# Altium PCB Amber_Main_Board.PcbDoc (part 2 of 6)
Units mm, origin at the board's own origin, x right, y up, seen from the top; angles counter-clockwise.
Board outline 90 x 23 mm, 4 copper layers (Top Layer, Power, Ground, Bottom Layer), stack 1.142 mm thick; 237 components, 104 nets, 614 pads, 347 vias.
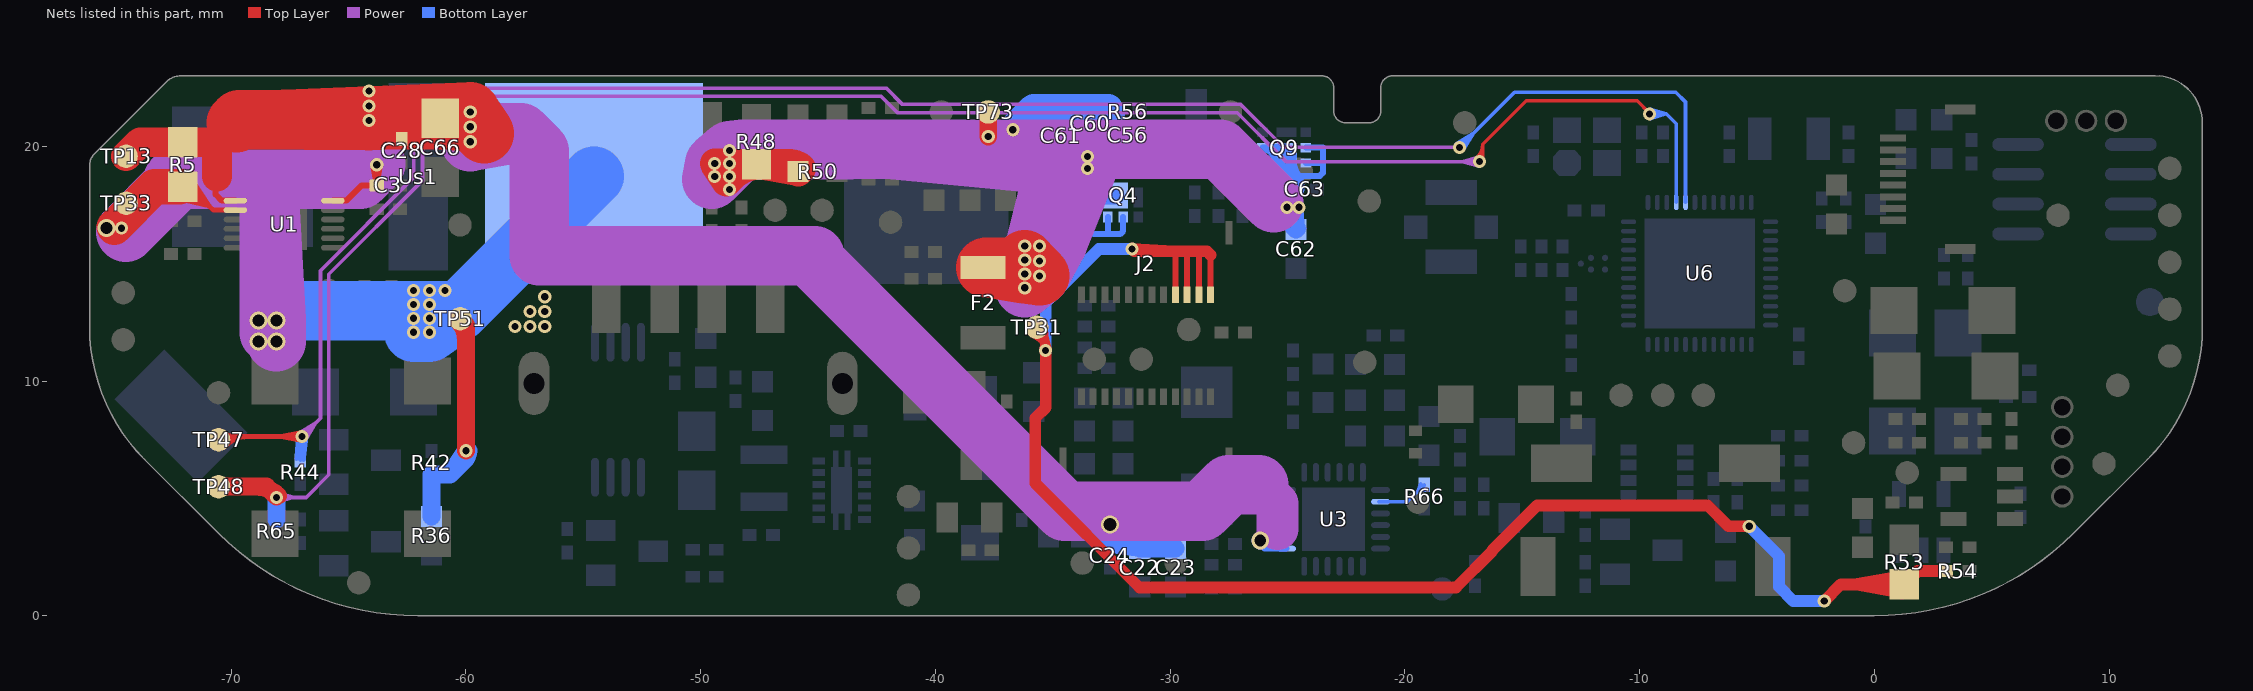
[diagram p4: the nets of this part, all layers, seen from the top]

## Via types
v1: diameter 0.559, hole 0.305, Top Layer to Bottom Layer, tented both sides, 306 vias
v2: diameter 0.66, hole 0.33, Top Layer to Bottom Layer, tented both sides, 16 vias
v3: diameter 0.762, hole 0.508, Top Layer to Bottom Layer, tented both sides, 12 vias
v4: diameter 0.6, hole 0.3, Top Layer to Bottom Layer, tented both sides, 9 vias
v5: diameter 0.5, hole 0.3, Top Layer to Bottom Layer, 3 vias
v6: diameter 0.762, hole 0.559, Top Layer to Bottom Layer, tented both sides, 1 vias

## Nets (pads, with @x,y where several pads share a name; then routed paths per layer and width w, separated by ;. In a path a pad name is that pad's centre, name@x,y a point inside that pad or via, vN(x,y) a via of type N, cw(c..) or ccw(c..) an arc to the next point about the centre after c; other vN are vias at no path point) (continued)
AW_VCC-: J2.1 J2.2 J2.3 J2.4 R53.2 R54.1 TP31.1 | length 99.8
  Top Layer w0.254: TP31.1@-35.984,12.061 -35.489,11.72 ; TP31.1@-35.808,11.934 cw(c-36.048,11.232) v1@-35.306,11.232 ; TP31.1@-35.726,12.174 cw(c-35.927,11.587) -35.306,11.587 ; TP31.1@-35.643,12.415 cw(c-35.805,11.943) -35.306,11.943 ; TP31.1@-35.533,11.947 cw(c-35.449,11.763) -35.306,11.906 ; v1@-35.458,11.291 -35.405,11.603 ; v1@-35.457,11.322 -35.306,11.906 ; v1@-35.438,11.379 ccw(c-35.702,11.532) -35.408,11.611 ; v1@-35.414,11.411 ccw(c-35.674,11.671) -35.306,11.671 ccw(c-34.938,11.671) v1@-35.198,11.411 ; -35.414,11.634 ccw(c-35.137,11.708) v1@-35.247,11.444 ; TP31.1@-35.347,12.133 ccw(c-35.163,12.049) -35.306,11.906 ; TP31.1@-35.314,12.295 -35.489,11.72 ; v1@-35.177,11.384 -35.405,11.603 ; v1@-35.155,11.322 -35.306,11.906 ; J2.4@-29.78,13.675 -29.78,15.523 ; J2.4@-29.78,13.875 -29.78,14.787 ; J2.3@-29.28,13.675 -29.28,15.523 ; J2.3@-29.28,13.875 -29.28,14.787 ; J2.2@-28.78,13.675 -28.78,15.486 ; J2.2@-28.78,13.875 -28.78,14.787 ; J2.1@-28.28,13.675 -28.28,15.367 ; J2.1@-28.28,13.875 -28.28,14.787 ; -35.489,11.72 TP31.1@-35.687,12.287 -35.306,11.906 ; -35.405,11.603 v1(-35.306,11.303) -35.306,11.906
  Top Layer w0.5: v1(-35.306,11.303) -35.306,8.869 -35.75,8.425 -35.75,5.647 -31.308,1.205 -17.825,1.205 -16.285,2.745 -16.285,2.782 -14.368,4.699 -7.112,4.699 -6.223,3.81 ; v1@-31.602,15.642 ccw(c-31.316,15.928) -31.316,15.523 ; -29.826,15.523 v1(-31.623,15.621) -31.525,15.523 -29.78,15.523 -29.28,15.523 -28.436,15.523 -28.28,15.367 ; v1(-2.14,0.625) -1.429,1.336 R53.2@1.27,1.336 ; R53.2@1.005,1.071 ccw(c0.365,0.431) 0.365,1.336 ccw(c0.365,2.241) R53.2@1.005,1.601 ; R53.2@1.16,1.226 R53.2@1.27,1.336 ; R53.2@1.162,1.002 0.599,1.367 ; R53.2@1.162,1.67 0.599,1.305 ; R53.2@1.168,0.95 0.599,1.305 ; R53.2@1.168,1.722 0.599,1.367 ; R53.2@1.237,0.962 -0.855,1.336 ; R53.2@1.237,1.71 -0.855,1.336 ; R53.2@1.27,1.311 0.599,1.305 ; R53.2@1.27,1.361 0.599,1.367 ; R54.1@3.006,1.905 R53.2@1.839,1.905 ; R54.1@3.056,1.905 R53.2@1.839,1.905 ; -6.223,3.81 v1(-5.334,3.81) -6.223,3.81 ; -0.855,1.336 R53.2@1.27,1.336 ; R53.2@1.27,1.336 R53.2@1.839,1.905
  Bottom Layer w0.5: v1(-35.306,11.303) -35.306,13.362 -33.047,15.621 ; v1(-5.334,3.81) -4.064,2.54 -4.064,1.233 -3.456,0.625 ; -33.047,15.621 v1(-31.623,15.621) -33.047,15.621 ; -3.456,0.625 v1(-2.14,0.625) -3.456,0.625
BAT: C22.1 C23.1 C24.1 C28.1 C66.1 R5.2 TP13.1 U1.7 U3.13 U3.14 | length 169
  Top Layer w0.254: -70.6,18.714 -70.666,18.648 -70.666,17.952 -70.396,17.682 U1.7@-69.82,17.682
  Top Layer w1.27: -70.6,18.714 -70.6,20.177 ; -69.777,21 -70.6,20.177 ; TP13.1@-74.476,19.571 -73.875,20.172 ; TP13.1@-74.476,19.571 -73.875,20.172 ; TP13.1@-74.476,19.571 -73.875,20.172 ; -73.875,20.172 R5.2@-72.063,20.172 ; -73.875,20.172 R5.2@-72.063,20.172 ; R5.2@-72.063,20.172 -70.605,20.172 -70.6,20.177
  Top Layer w2.54: -69.777,21 -69.65,21.127 ; -69.65,21.127 v1(-64.135,21.095) ; -69.65,21.127 C66.1@-61.087,21.127 ; v1(-64.135,21.095) -67.716,21.141 v1(-59.817,21.463) ; v1(-64.135,21.095) v1(-59.817,21.463) ; v1(-64.135,21.095) -67.867,21.127 v1(-59.817,21.463) ; v1(-64.135,21.095) v1(-59.817,21.463) ; v1(-64.135,21.095) -69.509,21.127 C66.1@-61.087,21.195 ; v1(-64.135,21.095) C66.1@-61.087,21.195 ; C66.1@-61.087,21.127 v1(-59.817,21.463) ; C66.1@-61.087,21.127 v1(-59.817,21.463) ; C66.1@-61.087,21.127 -59.797,21.127 ; C66.1@-61.087,21.145 v1(-59.817,21.463) ; C66.1@-61.087,21.145 v1(-59.817,21.463) ; C66.1@-61.087,21.145 v1(-59.817,21.463) ; C66.1@-61.087,21.145 v1(-59.817,21.463) ; C66.1@-61.087,21.145 -59.797,21.127 ; C66.1@-61.087,21.145 -59.797,21.127 ; C66.1@-61.087,21.145 v1@-59.658,20.987 ; C66.1@-61.087,21.145 v1@-59.658,20.987 ; C66.1@-61.087,21.195 v1(-59.817,21.463) ; v1(-59.817,21.463) -59.797,21.127 ; v1(-59.817,21.463) -59.797,21.127 ; v1(-59.817,21.463) v1@-59.658,20.987 ; v1(-59.817,21.463) v1@-59.658,20.987 ; v1(-59.817,21.463) -59.797,21.127 ; v1(-59.817,21.463) -59.797,21.127 ; v1(-59.817,21.463) v1@-59.658,20.987 ; v1(-59.817,21.463) v1@-59.658,20.987 ; v1(-59.817,21.463) -59.213,20.543 v1@-59.658,20.987 ; -59.797,21.127 v1@-59.658,20.987
  Power w0.762: v3(-26.162,3.204) -25.425,3.94
  Power w1.778: -26.22,5.575 -25.425,4.78 -25.425,3.94 -25.425,3.697
  Power w2.54: -26.22,5.575 -27.51,5.575 -28.632,4.453 -34.491,4.453 -45.141,15.103 -45.141,15.342 -56.874,15.342 -56.874,19.79 -57.658,20.574 ; -57.658,20.574 v1(-59.817,20.193) -59.817,20.574 -57.658,20.574
  Bottom Layer w0.254: v3@-26.224,2.957 U3.13@-25.316,2.859 ; v3@-26.21,2.954 U3.13@-25.041,2.859 ; v3@-26.062,3.437 U3.13@-25.041,2.859 ; v3@-26.034,3.423 U3.13@-25.316,2.859 ; U3.14@-25.316,3.359 v3@-26.162,3.359 ; U3.14@-25.041,3.359 v3@-26.162,3.359 ; v3(-26.162,3.204) U3.13@-25.316,2.859 ; v3(-26.162,3.204) U3.13@-25.041,2.859 ; v3(-26.162,3.204) v3@-26.162,3.359 ; v3(-26.162,3.204) -26.162,3.048 -25.973,2.859 ; -25.973,2.859 U3.13@-25.316,2.859 ; -25.973,2.859 U3.13@-25.041,2.859
  Bottom Layer w0.762: C24.1@-32.549,3.053 C23.1@-29.772,2.87 ; C24.1@-32.566,3.053 v6(-32.566,3.883) ; C24.1@-32.566,3.053 C22.1@-31.296,2.87 ; C24.1@-32.566,3.053 C23.1@-29.955,3.053 ; C24.1@-32.566,3.053 v6(-32.566,3.883) ; v6(-32.566,3.883) -32.566,3.103 v6(-32.566,3.883) ; C22.1@-31.296,2.87 C23.1@-29.772,2.87 ; C22.1@-31.296,2.87 C23.1@-29.955,3.053 ; C23.1@-29.955,3.053 C23.1@-29.772,2.87
  other v1: -57.912,12.319 -57.277,12.319 -56.642,12.319 -57.277,12.954 -56.642,12.954 -56.642,13.589 -59.817,20.828 -64.135,21.717 -64.135,22.352
BATTERY: C3.1 R5.1 TP33.1 U1.6 U1.8 Us1.1 | length 151.8
  Top Layer w0.203: R5.1@-72.279,17.77 -70.916,17.44 ; R5.1@-72.27,17.766 -71.22,17.6 ; R5.1@-72.217,17.966 -71.22,17.6 ; R5.1@-72.216,17.966 -70.916,17.44 ; R5.1@-72.18,17.737 -71.418,17.83 ; R5.1@-72.177,17.947 -71.418,17.83 ; R5.1@-72.129,18.15 -71.22,17.6 ; R5.1@-72.126,18.148 -70.916,17.44 ; R5.1@-72.119,18.144 -71.418,17.83 ; R5.1@-72.063,18.272 -71.748,18.272 -70.758,17.282 ; R5.1@-72.051,18.13 cw(c-71.964,17.284) -71.362,17.886 ; R5.1@-72.03,17.928 cw(c-71.907,16.737) -71.06,17.584 ; R5.1@-72.009,17.726 cw(c-71.851,16.189) -70.758,17.282 ; R5.1@-71.987,18.335 -71.22,17.6 ; R5.1@-71.85,18.486 -70.916,17.44 ; R5.1@-71.837,18.474 -71.418,17.83 ; R5.1@-71.832,18.469 -71.22,17.6 ; R5.1@-71.687,18.611 -70.916,17.44 ; R5.1@-71.652,18.571 -71.22,17.6 ; R5.1@-71.646,18.563 -71.418,17.83 ; R5.1@-71.54,18.247 ccw(c-71.097,18.247) -71.41,17.934 ; U1.8@-69.82,17.282 -70.758,17.282 ; R5.1@-72.063,18.247 -71.418,17.83 ; R5.1@-72.063,18.247 -71.22,17.6 ; R5.1@-72.063,18.247 -70.916,17.44 ; -71.418,17.83 -71.992,18.34 -70.916,17.44
  Top Layer w0.254: U1.6@-65.67,17.682 -65.094,17.682 -64.443,18.333 ; v1@-63.952,19.201 C3.1@-63.8,18.333 ; C3.1@-63.937,18.246 ccw(c-64.147,18.036) -64.147,18.333 ccw(c-64.147,18.63) C3.1@-63.937,18.42 ; v1@-63.908,19.106 cw(c-64.168,18.846) -63.8,18.846 cw(c-63.432,18.846) v1@-63.692,19.106 ; C3.1@-63.887,18.42 ccw(c-64.097,18.63) -63.8,18.63 ccw(c-63.503,18.63) C3.1@-63.713,18.42 ; C3.1@-63.85,18.333 -64.443,18.333 ; v1(-63.8,19.214) C3.1@-63.8,18.333 ; v1@-63.648,19.201 C3.1@-63.8,18.333 ; -64.443,18.333 C3.1@-63.8,18.333
  Top Layer w1.524: v3@-74.984,16.555 -73.267,18.272 R5.1@-72.2,18.272
  Power w2.54: v1@-74.493,16.35 -72.461,18.382 -72.461,18.587 -68.961,18.587 ; v1@-63.834,19.257 -64.503,18.587 -65.828,18.587 -68.961,18.587 ; -68.961,18.587 -68.371,17.996 ; -68.371,17.996 v3(-68.072,11.684) v3(-68.072,12.573) ; -68.371,17.996 v3(-68.072,12.573) ; -68.371,17.996 v3(-68.072,12.573) ; -68.371,17.996 -68.371,12.065 v3(-68.072,12.573)
  Bottom Layer w2.54: -68.219,12.205 -67.425,12.999 ; Us1.1@-54.545,18.726 -60.272,12.999 ; -67.425,12.999 v3(-68.072,12.573) -67.425,12.999 ; -67.425,12.999 -60.272,12.999 ; v1(-62.23,12.078) -60.272,12.999 ; v1(-62.23,12.078) v1(-61.559,12.67) ; v1(-62.23,12.078) -60.272,12.999 ; v1(-62.23,12.078) v1(-61.559,12.67) ; v1(-62.23,12.078) -60.272,12.999 ; v1(-62.23,12.078) v1(-61.559,12.67) ; v1(-62.23,12.078) -60.272,12.999 ; v1(-62.23,12.078) v1(-61.559,12.078) ; v1(-62.23,12.078) v1(-61.559,12.67) ; v1(-62.23,12.078) v1(-61.559,12.078) ; v1(-62.23,12.078) -60.272,12.999 ; v1(-62.23,12.078) v1(-61.559,12.078) ; v1(-62.23,12.078) v1(-61.559,12.67) ; v1(-62.23,12.078) v1(-61.559,12.078) ; v1(-62.23,12.078) -60.272,12.999 ; v1(-62.23,12.078) v1(-61.559,12.078) ; v1(-62.23,12.078) v1(-61.559,12.67) ; v1(-62.23,12.078) v1(-61.559,12.078) ; v1(-62.23,12.078) -60.272,12.999 ; v1(-62.23,12.078) v1(-61.559,12.078) ; v1(-62.23,12.078) -60.272,12.999 ; v1(-62.23,12.078) v1(-61.559,12.078) ; v1(-62.23,12.078) v1(-61.559,12.67) ; v1(-62.23,12.078) v1(-61.559,12.078) ; v1(-62.23,12.078) -60.272,12.999 ; v1(-62.23,12.078) -60.272,12.999 ; v1(-62.23,12.078) v1(-62.23,12.67) ; v1(-62.23,12.078) v1(-61.559,12.67) ; v1(-62.23,12.078) v1(-62.23,12.67) ; v1(-62.23,12.078) v1(-61.559,12.078) ; v1(-62.23,12.078) v1(-62.23,12.67) ; v1(-62.23,12.078) v1(-61.559,12.078) ; v1(-62.23,12.078) v1(-62.23,12.67) ; v1(-62.23,12.67) -60.272,12.999 ; v1(-62.23,12.67) v1(-61.559,12.67) ; v1(-62.23,12.67) v1(-61.559,12.078) ; v1(-62.23,12.67) v1(-61.559,12.078) ; v1(-61.559,12.078) -60.272,12.999 ; v1(-61.559,12.078) v1(-61.559,12.67) ; v1(-61.559,12.078) -60.272,12.999 ; v1(-61.559,12.078) v1(-61.559,12.67) ; v1(-61.559,12.078) -60.272,12.999 ; v1(-61.559,12.078) v1(-61.559,12.67) ; v1(-61.559,12.078) -60.272,12.999 ; v1(-61.559,12.078) -60.272,12.999 ; v1(-61.559,12.078) v1(-61.559,12.67) ; v1(-61.559,12.67) -60.272,12.999 ; v1(-61.559,12.67) -60.272,12.999 ; v1(-61.559,12.67) -60.272,12.999
  other v1: -62.23,13.263 -61.559,13.263 -62.23,13.856 -61.559,13.856 -60.887,13.856 -74.676,16.51
  other v3: -68.834,11.684 -68.834,12.573 -75.311,16.51
BUZZER_IO: R44.2 TP47.1 U6.41 | length 115.5
  Top Layer w0.203: TP47.1@-70.559,7.694 -70.03,7.65 ; TP47.1@-70.54,7.695 -69.986,7.601 ; TP47.1@-70.5,7.896 -70.03,7.65 ; TP47.1@-70.471,7.317 -69.986,7.601 ; TP47.1@-70.467,7.892 -69.986,7.601 ; TP47.1@-70.45,7.326 -70.03,7.65 ; TP47.1@-70.406,7.633 v1(-66.983,7.633) ; TP47.1@-70.401,7.362 cw(c-69.747,6.707) -69.747,7.633 ; TP47.1@-70.333,7.159 -69.986,7.601 ; TP47.1@-70.291,7.188 -70.03,7.65 ; TP47.1@-70.257,7.218 cw(c-69.256,6.217) -69.256,7.633 ; TP47.1@-70.257,7.781 ccw(c-69.898,8.14) -69.898,7.633 ; v1@-67.109,7.507 ccw(c-67.412,7.203) -67.412,7.633 ccw(c-67.412,8.062) v1@-67.109,7.758 ; v1@-67.04,7.464 -67.301,7.647 ; v1@-67.04,7.801 -67.301,7.618 ; v1@-67.025,7.46 -67.301,7.618 ; v1@-67.025,7.806 -67.301,7.647 ; v1@-67.001,7.456 -67.872,7.633 v1@-67.001,7.81 ; -70.03,7.65 TP47.1@-70.539,7.5 -69.986,7.601 ; -67.301,7.618 v1(-66.983,7.633) ; -67.301,7.647 v1(-66.983,7.633)
  Power w0.152: v1@-67.109,7.793 -66.38,8.235 v1@-66.823,7.507 ; v1(-66.983,7.633) -66.196,8.42 -66.196,14.703 -62.23,18.669 -62.23,21.59 -61.341,22.479 -42.1,22.479 -41.402,21.781 -26.988,21.781 -25.159,19.952 v1(-17.679,19.952) ; v1@-66.983,7.836 ccw(c-66.983,8.326) -66.636,7.98 ccw(c-66.289,7.633) v1@-66.78,7.633
  Bottom Layer w0.152: v1@-17.804,20.112 -17.076,20.554 v1@-17.519,19.826 ; v1(-17.679,19.952) -15.329,22.301 -8.462,22.301 -8.047,21.886 U6.41@-8.047,17.608 ; v1@-17.679,20.155 ccw(c-17.679,20.645) -17.332,20.299 ccw(c-16.985,19.952) v1@-17.476,19.952 ; U6.41@-8.047,17.833 -8.047,18.39
  Bottom Layer w0.203: R44.2@-67.202,6.684 v1@-66.983,7.524 ; R44.2@-67.196,6.707 -67.004,7.036 ; R44.2@-67.161,6.764 ccw(c-67.59,7.193) -66.983,7.193 ; v1@-67.161,7.628 R44.2@-67.049,6.745 ; v1@-67.16,7.615 -66.983,6.744 v1@-66.806,7.615 ; v1@-67.159,7.655 R44.2@-67.183,6.758 ; v1@-67.158,7.601 R44.2@-66.915,6.745 ; v1@-67.156,7.591 -66.998,7.315 ; v1@-67.151,7.575 -66.968,7.315 ; v1@-67.109,7.507 cw(c-67.412,7.203) -66.983,7.203 cw(c-66.554,7.203) v1@-66.857,7.507 ; R44.2@-66.983,6.682 v1(-66.983,7.633) ; R44.2@-66.907,6.659 v1@-66.983,7.524 ; R44.2@-66.908,6.667 -67.004,7.036 ; v1@-66.815,7.575 -66.998,7.315 ; v1@-66.814,7.576 R44.2@-67.183,6.758 ; v1@-66.81,7.591 -66.968,7.315 ; v1@-66.808,7.602 R44.2@-67.049,6.745 ; v1@-66.805,7.629 R44.2@-66.915,6.745 ; R44.2@-67.183,6.758 v1(-66.983,7.633) ; R44.2@-67.049,6.745 v1(-66.983,7.633) ; -67.004,7.036 -67.056,6.659 v1@-66.983,7.524 ; -66.998,7.315 v1(-66.983,7.633) ; v1(-66.983,7.633) R44.2@-66.915,6.745 ; v1(-66.983,7.633) -66.968,7.315
BUZZER_POWER: R65.2 TP48.1 U6.40 | length 101.8
  Top Layer w0.152: v1@-16.952,19.501 ccw(c-17.46,20.079) -16.691,20.079 ; v1@-16.852,19.387 ccw(c-17.164,19.742) -16.691,19.742 ; v1@-16.691,19.349 -16.691,20.079 ; v1(-9.579,21.381) -9.579,21.409 -10.11,21.94 -14.83,21.94 -16.691,20.079
  Top Layer w0.762: TP48.1@-70.539,5.5 -68.494,5.5 v1@-68.072,5.078 ; -68.94,5.5 cw(c-68.94,4.171) v1@-68,5.111
  Power w0.152: v1@-68.044,4.837 -67.335,5.039 v1@-68.044,5.24 ; v1@-68.024,4.841 -67.708,5.022 ; v1@-68.024,5.236 -67.708,5.055 ; v1@-68.006,4.846 -67.708,5.055 ; v1@-68.006,5.231 -67.708,5.022 ; v1@-67.928,4.895 cw(c-67.581,4.548) -67.581,5.039 cw(c-67.581,5.529) v1@-67.928,5.182 ; v1@-16.962,19.205 ccw(c-17.309,18.858) -17.309,19.349 ccw(c-17.309,19.839) v1@-16.962,19.492 ; v1@-16.884,19.156 -17.182,19.365 ; v1@-16.884,19.541 -17.182,19.332 ; v1@-16.866,19.151 -17.182,19.332 ; v1@-16.866,19.546 -17.182,19.365 ; v1@-16.846,19.147 -17.555,19.349 v1@-16.846,19.55 ; v1(-68.072,5.039) -67.708,5.022 ; v1(-68.072,5.039) -67.708,5.055 ; v1(-68.072,5.039) -66.802,5.039 -65.84,6.001 -65.84,14.551 -61.849,18.542 -61.849,21.336 -61.062,22.123 -42.316,22.123 -41.618,21.425 -27.14,21.425 -25.064,19.349 v1(-16.818,19.349) ; -17.182,19.332 v1(-16.818,19.349) ; -17.182,19.365 v1(-16.818,19.349)
  Bottom Layer w0.152: v1@-9.55,21.18 -8.863,21.381 ; v1@-9.55,21.582 -8.863,21.381 ; v1@-9.531,21.183 -9.215,21.364 ; v1@-9.531,21.578 -9.215,21.397 ; v1@-9.513,21.188 -9.215,21.397 ; v1@-9.513,21.573 -9.215,21.364 ; v1@-9.435,21.237 cw(c-9.088,20.89) -9.088,21.381 cw(c-9.088,21.871) v1@-9.435,21.524 ; U6.40@-8.447,17.608 -8.447,20.965 -8.863,21.381 ; U6.40@-8.447,17.833 -8.447,18.39 ; v1(-9.579,21.381) -9.215,21.364 ; v1(-9.579,21.381) -9.215,21.397 ; v1(-9.579,21.381) -8.863,21.381
  Bottom Layer w0.762: v1(-68.072,5.039) -68.072,4.151 v1(-68.072,5.039) ; v1(-68.072,5.039) R65.2@-68.072,4.101 v1(-68.072,5.039)
BUZZER_VCC: R36.1 R42.1 TP51.1 | length 15.6
  Top Layer w0.762: TP51.1@-60.336,12.566 cw(c-61.153,11.749) -59.998,11.749 ; TP51.1@-60.052,12.45 TP51.1@-60.252,12.65 -60.037,12.048 ; v1(-59.998,7.03) TP51.1@-59.998,12.396
  Bottom Layer w0.762: R42.1@-61.468,5.972 R36.1@-61.468,4.236 R42.1@-61.468,6.022 ; -60.056,6.645 ccw(c-60.441,7.03) v1@-59.896,7.03 ; R42.1@-61.468,6.022 -60.679,6.022 ; R42.1@-61.468,6.022 -60.679,6.022 ; -60.679,6.022 v1(-59.998,7.03) ; -60.679,6.022 -59.998,6.703 ; -59.998,6.703 v1(-59.998,7.03) ; -59.998,6.703 v1(-59.998,7.03)
CHARGE_O: C56.2 C60.1 C61.1 C62.1 C63.1 F2.2 Q4.1 Q4.2 Q4.5 Q4.6 Q4.7 Q9.1 Q9.2 Q9.5 Q9.6 Q9.7 R48.1 R50.1 R56.2 TP73.1 | length 1016.8
  Top Layer w0.762: v1(-37.751,20.415) TP73.1@-37.751,21.463 v1(-37.751,20.415)
  Top Layer w1.27: v1@-48.536,18.851 cw(c-47.625,17.94) R48.1@-47.625,19.228 ; R48.1@-47.958,19.184 v1(-48.768,18.711) ; R50.1@-46.173,19.243 cw(c-46.173,18.597) R50.1@-45.716,19.054 ; v1(-49.403,19.262) v1(-48.768,19.262) ; v1(-49.403,19.262) R48.1@-47.625,19.243 ; v1(-49.403,19.262) v1(-48.768,19.262) ; v1(-49.403,19.262) R48.1@-48.143,19.243 ; v1(-49.403,19.262) v1(-48.768,19.262) ; v1(-49.403,19.262) R48.1@-47.625,19.218 ; v1(-49.403,19.262) v1(-48.768,19.262) ; v1(-49.403,19.262) -48.269,19.055 ; v1(-49.403,19.262) v1(-48.768,19.262) ; v1(-49.403,19.262) R48.1@-48.143,19.243 ; v1(-49.403,19.262) v1(-48.768,19.262) ; v1(-49.403,19.262) R48.1@-48.143,19.243 ; v1(-49.403,19.262) v1(-48.768,18.711) ; v1(-49.403,19.262) v1(-48.768,18.711) ; v1(-49.403,19.262) v1(-48.768,18.711) ; v1(-49.403,19.262) v1(-48.768,18.711) ; v1(-49.403,19.262) v1(-48.768,18.711) ; v1(-49.403,19.262) v1(-48.768,18.711) ; v1(-49.403,19.262) v1(-48.768,18.711) ; v1(-49.403,19.262) v1(-48.768,18.711) ; v1(-49.403,19.262) v1(-48.768,18.711) ; v1(-49.403,19.262) v1(-48.768,18.711) ; v1(-49.403,19.262) v1(-48.768,18.711) ; v1(-49.403,19.262) v1(-48.768,18.711) ; v1(-49.403,19.262) v1(-48.768,18.711) ; v1(-49.403,19.262) v1(-48.768,18.711) ; v1(-49.403,19.262) v1@-48.895,18.491 ; v1(-49.403,19.262) v1@-48.895,18.491 ; v1@-48.895,18.491 v1(-48.768,19.262) ; v1@-48.895,18.491 R48.1@-48.143,19.243 ; v1(-48.768,18.711) v1(-48.768,19.262) ; v1(-48.768,18.711) v1(-48.768,19.262) ; v1(-48.768,18.711) v1(-48.768,19.262) ; v1(-48.768,18.711) v1(-48.768,19.262) ; v1(-48.768,18.711) v1(-48.768,19.262) ; v1(-48.768,18.711) v1(-48.768,19.262) ; v1(-48.768,18.711) v1(-48.768,19.262) ; v1(-48.768,18.711) v1(-48.768,19.262) ; v1(-48.768,18.711) v1(-48.768,19.262) ; v1(-48.768,18.711) v1(-48.768,19.262) ; v1(-48.768,18.711) v1(-48.768,19.262) ; v1(-48.768,18.711) v1(-48.768,19.262) ; v1(-48.768,18.711) R48.1@-48.143,19.243 ; v1(-48.768,18.711) -48.269,19.055 ; v1(-48.768,18.711) R48.1@-48.143,19.243 ; v1(-48.768,18.711) -48.269,19.055 ; v1(-48.768,18.711) R48.1@-48.143,19.243 ; v1(-48.768,18.711) R48.1@-48.143,19.243 ; v1(-48.768,18.711) -48.269,19.055 ; v1(-48.768,18.711) R48.1@-48.143,19.243 ; v1(-48.768,18.711) R48.1@-48.143,19.243 ; v1(-48.768,18.711) R48.1@-48.143,19.243 ; v1(-48.768,19.262) R48.1@-47.625,19.243 ; v1(-48.768,19.262) R48.1@-48.143,19.243 ; v1(-48.768,19.262) R48.1@-47.625,19.218 ; v1(-48.768,19.262) -48.269,19.055 ; v1(-48.768,19.262) R48.1@-48.143,19.243 ; -48.269,19.055 R48.1@-47.625,19.218 ; R48.1@-48.143,19.243 R48.1@-47.625,19.243 ; R48.1@-47.625,19.243 R50.1@-45.847,18.923 -46.167,19.243 R48.1@-47.625,19.243
  Top Layer w2.54: F2.2@-37.846,14.835 v1(-36.195,14.563) ; F2.2@-37.846,14.835 v1(-35.56,14.478) ; F2.2@-37.846,14.835 v1(-35.56,14.478) ; F2.2@-37.846,14.835 -35.965,14.835 ; F2.2@-37.523,14.835 -35.941,14.859 ; F2.2@-37.523,14.835 -35.965,14.835 ; F2.2@-37.523,14.835 -35.965,14.835 ; F2.2@-37.523,14.835 v1(-36.195,14.563) ; F2.2@-37.523,14.835 v1(-36.195,14.563) ; F2.2@-37.523,14.835 v1(-36.195,14.563) ; F2.2@-37.523,14.835 v1(-35.56,14.478) ; F2.2@-37.523,14.835 v1(-35.56,14.478) ; F2.2@-37.523,14.835 v1(-35.56,14.478) ; F2.2@-37.523,14.835 v1(-35.56,14.478) ; F2.2@-37.523,14.835 v1(-35.56,14.478) ; F2.2@-37.523,14.835 v1(-35.56,14.478) ; v1(-36.195,14.563) -35.941,14.859 ; v1(-36.195,14.563) -35.941,14.859 ; v1(-36.195,14.563) v1(-35.56,14.478) ; v1(-36.195,14.563) v1(-35.56,14.478) ; v1(-36.195,14.563) v1(-35.56,14.478) ; v1(-36.195,14.563) v1(-35.56,14.478) ; v1(-36.195,14.563) v1(-35.56,14.478) ; v1(-36.195,14.563) v1(-35.56,14.478) ; v1(-36.195,14.563) v1(-36.195,15.155) ; v1(-36.195,14.563) v1(-36.195,15.155) ; v1(-36.195,14.563) v1(-36.195,15.155) ; v1(-36.195,14.563) v1(-36.195,15.155) ; v1(-36.195,14.563) v1(-36.195,15.155) ; v1(-36.195,14.563) v1(-36.195,15.155) ; v1(-36.195,14.563) v1(-36.195,15.155) ; v1(-36.195,14.563) v1(-36.195,15.155) ; v1(-36.195,14.563) v1(-36.195,15.155) ; v1(-36.195,14.563) v1(-36.195,15.155) ; v1(-36.195,14.563) v1(-36.195,15.155) ; v1(-36.195,14.563) v1(-36.195,15.155) ; v1(-36.195,15.155) -35.941,14.859 ; v1(-36.195,15.155) -35.965,14.835 ; v1(-36.195,15.155) -35.941,14.859 ; v1(-36.195,15.155) -35.941,14.859 ; v1(-36.195,15.155) v1(-35.56,14.478) ; v1(-36.195,15.155) -35.941,14.859 ; v1(-36.195,15.155) v1(-35.56,14.478) ; v1(-36.195,15.155) -35.965,14.835 ; v1(-36.195,15.155) v1(-35.56,14.478) ; v1(-36.195,15.155) -35.941,14.859 ; v1(-36.195,15.155) v1(-35.56,14.478) ; v1(-36.195,15.155) v1(-35.56,14.478) ; v1(-36.195,15.155) -35.941,14.859 ; v1(-36.195,15.155) v1(-35.56,14.478) ; v1(-36.195,15.155) v1(-35.56,14.478) ; v1(-36.195,15.155) -35.965,14.835 ; v1(-36.195,15.155) v1(-35.56,14.478) ; v1(-36.195,15.155) -35.941,14.859 ; v1(-36.195,15.155) v1(-35.56,14.478) ; v1(-36.195,15.155) -35.965,14.835 ; v1(-36.195,15.155) v1(-35.56,14.478) ; v1(-36.195,15.155) -35.965,14.835 ; v1(-36.195,15.155) v1(-35.56,14.478) ; v1(-36.195,15.155) v1(-35.56,14.478) ; v1(-36.195,15.155) v1(-35.56,14.478) ; v1(-36.195,15.155) v1(-35.56,14.478) ; v1(-36.195,15.155) -35.965,14.835 ; v1(-36.195,15.155) -35.941,14.859 ; v1(-36.195,15.155) -35.965,14.835 ; v1(-36.195,15.155) -35.965,14.835 ; v1(-36.195,15.155) v1(-35.56,14.478) ; v1(-36.195,15.155) v1(-35.56,14.478) ; v1(-36.195,15.155) v1(-35.56,14.478) ; v1(-36.195,15.155) v1(-35.56,14.478) ; v1(-36.195,15.155) v1(-35.56,14.478) ; v1(-36.195,15.155) v1(-35.56,14.478) ; v1(-36.195,15.155) v1(-35.56,14.478) ; v1(-36.195,15.155) v1(-35.56,14.478) ; -35.965,14.835 v1(-35.56,14.478) ; -35.965,14.835 v1(-35.56,14.478) ; -35.965,14.835 v1(-35.56,14.478) ; -35.965,14.835 v1(-35.56,14.478) ; -35.965,14.835 -35.941,14.859 ; -35.941,14.859 v1(-35.56,14.478) ; -35.941,14.859 v1(-35.56,14.478) ; -35.941,14.859 v1(-35.56,14.478) ; -35.941,14.859 v1(-35.56,14.478)
  Power w2.54: -42.005,19.876 v1(-33.528,19.05) ; -41.566,19.876 v1(-33.528,19.558) ; -41.42,19.87 v1(-33.528,19.05) ; -40.862,19.876 v1(-48.768,19.812) ; -25.59,17.59 -27.877,19.876 -34.798,19.876 ; v1@-49.53,18.6 v1(-48.768,19.812) ; v1@-49.53,18.6 v1(-49.403,19.262) ; v1@-49.53,18.6 v1(-49.403,19.262) ; v1@-49.53,18.6 -48.254,19.876 ; v1(-49.403,18.711) v1(-48.768,19.812) ; v1(-49.403,18.711) v1(-48.768,19.812) ; v1(-49.403,18.711) v1(-48.768,19.812) ; v1(-49.403,18.711) v1(-49.403,19.262) ; v1(-49.403,18.711) v1(-49.403,19.262) ; v1(-49.403,18.711) v1(-49.403,19.262) ; v1(-49.403,18.711) v1(-48.768,19.812) ; v1(-49.403,18.711) v1(-49.403,19.262) ; v1(-49.403,18.711) v1(-48.768,19.812) ; v1(-49.403,18.711) v1(-49.403,19.262) ; v1(-49.403,18.711) v1(-49.403,19.262) ; v1(-49.403,18.711) v1(-49.403,19.262) ; v1(-49.403,18.711) v1(-48.768,19.812) ; v1(-49.403,18.711) v1(-49.403,19.262) ; v1(-49.403,18.711) v1(-49.403,19.262) ; v1(-49.403,18.711) v1(-48.768,19.812) ; v1(-49.403,18.711) v1(-49.403,19.262) ; v1(-49.403,18.711) v1(-48.768,19.812) ; v1(-49.403,19.262) -48.254,19.876 ; v1(-49.403,19.262) -48.254,19.876 ; v1(-49.403,19.262) v1(-48.768,19.812) ; v1(-49.403,19.262) v1(-48.768,19.812) ; v1(-49.403,19.262) -48.254,19.876 ; v1(-49.403,19.262) v1(-48.768,19.812) ; v1(-49.403,19.262) -48.254,19.876 ; v1(-49.403,19.262) v1(-48.768,19.812) ; v1(-48.768,19.812) -48.254,19.876 ; v1(-48.768,19.812) -48.254,19.876 ; -48.254,19.876 -34.798,19.876 ; v1(-36.195,13.97) -34.798,15.875 ; v1(-36.195,13.97) -35.941,14.732 ; v1(-36.195,13.97) -34.798,15.875 ; v1(-36.195,13.97) v1(-36.195,14.563) ; v1(-36.195,13.97) -34.798,15.875 ; v1(-36.195,13.97) v1(-35.56,14.478) ; v1(-36.195,13.97) v1(-35.56,14.478) ; v1(-36.195,13.97) -35.941,14.732 ; v1(-36.195,13.97) -34.798,15.875 ; v1(-36.195,13.97) v1(-35.56,14.478) ; v1(-36.195,13.97) v1(-35.56,14.478) ; v1(-36.195,13.97) v1(-36.195,14.563) ; v1(-36.195,13.97) v1(-35.56,15.748) ; v1(-36.195,13.97) -35.941,14.732 ; v1(-36.195,13.97) v1(-35.56,15.748) ; v1(-36.195,13.97) v1(-36.195,14.563) ; v1(-36.195,13.97) v1(-35.56,15.748) ; v1(-36.195,13.97) v1(-35.56,14.478) ; v1(-36.195,13.97) v1(-35.56,15.748) ; v1(-36.195,13.97) v1(-35.56,14.478) ; v1(-36.195,13.97) v1(-35.56,15.748) ; v1(-36.195,13.97) -35.941,14.732 ; v1(-36.195,13.97) v1(-35.56,15.748) ; v1(-36.195,13.97) v1(-35.56,14.478) ; v1(-36.195,13.97) v1(-35.56,15.748) ; v1(-36.195,13.97) v1(-35.56,14.478) ; v1(-36.195,13.97) v1(-35.56,15.748) ; v1(-36.195,13.97) v1(-36.195,14.563) ; v1(-36.195,13.97) v1(-35.56,15.113) ; v1(-36.195,13.97) -35.941,14.732 ; v1(-36.195,13.97) -34.798,15.875 ; v1(-36.195,13.97) v1(-35.56,15.113) ; v1(-36.195,13.97) v1(-35.56,15.113) ; v1(-36.195,13.97) v1(-36.195,14.563) ; v1(-36.195,13.97) -34.798,15.875 ; v1(-36.195,13.97) v1(-35.56,15.113) ; v1(-36.195,13.97) v1(-35.56,15.113) ; v1(-36.195,13.97) v1(-35.56,14.478) ; v1(-36.195,13.97) v1(-35.56,15.113) ; v1(-36.195,13.97) v1(-35.56,14.478) ; v1(-36.195,13.97) v1(-35.56,15.113) ; v1(-36.195,13.97) -35.941,14.732 ; v1(-36.195,13.97) -34.798,15.875 ; v1(-36.195,13.97) v1(-35.56,15.113) ; v1(-36.195,13.97) v1(-35.56,15.113) ; v1(-36.195,13.97) v1(-35.56,14.478) ; v1(-36.195,13.97) v1(-35.56,15.113) ; v1(-36.195,13.97) v1(-35.56,14.478) ; v1(-36.195,13.97) v1(-35.56,15.113) ; v1(-36.195,13.97) v1(-36.195,14.563) ; v1(-36.195,13.97) -34.798,15.875 ; v1(-36.195,13.97) v1(-35.56,15.113) ; v1(-36.195,13.97) v1(-35.56,15.748) ; v1(-36.195,13.97) v1(-35.56,15.113) ; v1(-36.195,13.97) v1(-35.56,15.748) ; v1(-36.195,13.97) v1(-35.56,15.113) ; v1(-36.195,13.97) v1(-35.56,15.113) ; v1(-36.195,13.97) -35.941,14.732 ; v1(-36.195,13.97) -34.798,15.875 ; v1(-36.195,13.97) v1(-35.56,15.113) ; v1(-36.195,13.97) v1(-35.56,15.748) ; v1(-36.195,13.97) v1(-35.56,15.113) ; v1(-36.195,13.97) v1(-35.56,15.748) ; v1(-36.195,13.97) v1(-35.56,15.113) ; v1(-36.195,13.97) v1(-35.56,15.113) ; v1(-36.195,13.97) v1(-36.195,14.563) ; v1(-36.195,13.97) -34.798,15.875 ; v1(-36.195,13.97) v1(-35.56,15.113) ; v1(-36.195,13.97) v1(-35.56,15.748) ; v1(-36.195,13.97) v1(-35.56,15.113) ; v1(-36.195,13.97) v1(-35.56,15.113) ; v1(-36.195,13.97) v1(-35.56,14.478) ; v1(-36.195,13.97) v1(-35.56,15.113) ; v1(-36.195,13.97) v1(-35.56,14.478) ; v1(-36.195,13.97) v1(-35.56,15.748) ; v1(-36.195,13.97) v1(-35.56,15.113) ; v1(-36.195,13.97) v1(-35.56,15.113) ; v1(-36.195,13.97) -35.941,14.732 ; v1(-36.195,13.97) -34.798,15.875 ; v1(-36.195,13.97) v1(-35.56,15.113) ; v1(-36.195,13.97) v1(-35.56,15.748) ; v1(-36.195,13.97) v1(-35.56,15.113) ; v1(-36.195,13.97) v1(-35.56,15.113) ; v1(-36.195,13.97) v1(-35.56,14.478) ; v1(-36.195,13.97) v1(-35.56,15.113) ; v1(-36.195,13.97) v1(-35.56,14.478) ; v1(-36.195,13.97) v1(-35.56,15.748) ; v1(-36.195,13.97) v1(-35.56,15.113) ; v1(-36.195,13.97) v1(-35.56,15.113) ; v1(-36.195,13.97) v1(-36.195,14.563) ; v1(-36.195,13.97) -34.798,15.875 ; v1(-36.195,13.97) v1(-35.56,15.113) ; v1(-36.195,13.97) v1(-35.56,15.748) ; v1(-36.195,13.97) v1(-35.56,15.113) ; v1(-36.195,13.97) -34.798,15.875 ; v1(-36.195,13.97) v1(-35.56,15.113) ; v1(-36.195,13.97) v1(-35.56,15.748) ; v1(-36.195,13.97) v1(-35.56,15.113) ; v1(-36.195,13.97) -34.798,15.875 ; v1(-36.195,13.97) v1(-36.195,15.155) ; v1(-36.195,13.97) -35.941,14.732 ; v1(-36.195,13.97) v1(-36.195,15.155) ; v1(-36.195,13.97) -34.798,15.875 ; v1(-36.195,13.97) v1(-36.195,15.155) ; v1(-36.195,13.97) -34.798,15.875 ; v1(-36.195,13.97) v1(-36.195,15.155) ; v1(-36.195,13.97) v1(-35.56,14.478) ; v1(-36.195,13.97) v1(-36.195,15.155) ; v1(-36.195,13.97) v1(-35.56,14.478) ; v1(-36.195,13.97) v1(-36.195,15.155) ; v1(-36.195,13.97) -35.941,14.732 ; v1(-36.195,13.97) v1(-36.195,15.155) ; v1(-36.195,13.97) -34.798,15.875 ; v1(-36.195,13.97) v1(-36.195,15.155) ; v1(-36.195,13.97) v1(-35.56,14.478) ; v1(-36.195,13.97) v1(-36.195,15.155) ; v1(-36.195,13.97) v1(-35.56,14.478) ; v1(-36.195,13.97) v1(-36.195,15.155) ; v1(-36.195,13.97) -34.798,15.875 ; v1(-36.195,13.97) v1(-36.195,15.155) ; v1(-36.195,13.97) v1(-35.56,15.748) ; v1(-36.195,13.97) v1(-36.195,15.155) ; v1(-36.195,13.97) v1(-35.56,15.748) ; v1(-36.195,13.97) v1(-36.195,15.155) ; v1(-36.195,13.97) -35.941,14.732 ; v1(-36.195,13.97) v1(-36.195,15.155) ; v1(-36.195,13.97) -34.798,15.875 ; v1(-36.195,13.97) v1(-36.195,15.155) ; v1(-36.195,13.97) v1(-35.56,15.748) ; v1(-36.195,13.97) v1(-36.195,15.155) ; v1(-36.195,13.97) v1(-35.56,15.748) ; v1(-36.195,13.97) v1(-36.195,15.155) ; v1(-36.195,13.97) -34.798,15.875 ; v1(-36.195,13.97) v1(-36.195,15.155) ; v1(-36.195,13.97) v1(-35.56,15.748) ; v1(-36.195,13.97) v1(-36.195,15.155) ; v1(-36.195,13.97) v1(-35.56,15.748) ; v1(-36.195,13.97) v1(-36.195,15.155) ; v1(-36.195,13.97) v1(-35.56,14.478) ; v1(-36.195,13.97) v1(-36.195,15.155) ; v1(-36.195,13.97) v1(-35.56,15.748) ; v1(-36.195,13.97) v1(-36.195,15.155) ; v1(-36.195,13.97) v1(-35.56,14.478) ; v1(-36.195,13.97) v1(-36.195,15.155) ; v1(-36.195,13.97) v1(-35.56,15.748) ; v1(-36.195,13.97) v1(-36.195,15.155) ; v1(-36.195,13.97) -35.941,14.732 ; v1(-36.195,13.97) v1(-36.195,15.155) ; v1(-36.195,13.97) -34.798,15.875 ; v1(-36.195,13.97) v1(-36.195,15.155) ; v1(-36.195,13.97) v1(-35.56,15.748) ; v1(-36.195,13.97) v1(-36.195,15.155) ; v1(-36.195,13.97) v1(-35.56,15.748) ; v1(-36.195,13.97) v1(-36.195,15.155) ; v1(-36.195,13.97) v1(-35.56,14.478) ; v1(-36.195,13.97) v1(-36.195,15.155) ; v1(-36.195,13.97) v1(-35.56,15.748) ; v1(-36.195,13.97) v1(-36.195,15.155) ; v1(-36.195,13.97) v1(-35.56,14.478) ; v1(-36.195,13.97) v1(-36.195,15.155) ; v1(-36.195,13.97) v1(-35.56,15.748) ; v1(-36.195,13.97) v1(-36.195,15.155) ; v1(-36.195,13.97) -34.798,15.875 ; v1(-36.195,13.97) v1(-36.195,15.155) ; v1(-36.195,13.97) v1(-35.56,15.748) ; v1(-36.195,13.97) v1(-36.195,15.155) ; v1(-36.195,13.97) v1(-35.56,15.113) ; v1(-36.195,13.97) v1(-36.195,15.155) ; v1(-36.195,13.97) -35.941,14.732 ; v1(-36.195,13.97) v1(-36.195,15.155) ; v1(-36.195,13.97) -34.798,15.875 ; v1(-36.195,13.97) v1(-36.195,15.155) ; v1(-36.195,13.97) v1(-35.56,15.113) ; v1(-36.195,13.97) v1(-36.195,15.155) ; v1(-36.195,13.97) v1(-35.56,15.113) ; v1(-36.195,13.97) v1(-36.195,15.155) ; v1(-36.195,13.97) -34.798,15.875 ; v1(-36.195,13.97) v1(-36.195,15.155) ; v1(-36.195,13.97) v1(-35.56,15.113) ; v1(-36.195,13.97) v1(-36.195,15.155) ; v1(-36.195,13.97) v1(-35.56,15.113) ; v1(-36.195,13.97) v1(-36.195,15.155) ; v1(-36.195,13.97) v1(-35.56,14.478) ; v1(-36.195,13.97) v1(-36.195,15.155) ; v1(-36.195,13.97) v1(-35.56,15.113) ; v1(-36.195,13.97) v1(-36.195,15.155) ; v1(-36.195,13.97) v1(-35.56,14.478) ; v1(-36.195,13.97) v1(-36.195,15.155) ; v1(-36.195,13.97) v1(-35.56,15.113) ; v1(-36.195,13.97) v1(-36.195,15.155) ; v1(-36.195,13.97) -35.941,14.732 ; v1(-36.195,13.97) v1(-36.195,15.155) ; v1(-36.195,13.97) -34.798,15.875 ; v1(-36.195,13.97) v1(-36.195,15.155) ; v1(-36.195,13.97) v1(-35.56,15.113) ; v1(-36.195,13.97) v1(-36.195,15.155) ; v1(-36.195,13.97) v1(-35.56,15.113) ; v1(-36.195,13.97) v1(-36.195,15.155) ; v1(-36.195,13.97) v1(-35.56,14.478) ; v1(-36.195,13.97) v1(-36.195,15.155) ; v1(-36.195,13.97) v1(-35.56,15.113) ; v1(-36.195,13.97) v1(-36.195,15.155) ; v1(-36.195,13.97) v1(-35.56,14.478) ; v1(-36.195,13.97) v1(-36.195,15.155) ; v1(-36.195,13.97) v1(-35.56,15.113) ; v1(-36.195,13.97) v1(-36.195,15.155) ; v1(-36.195,13.97) -34.798,15.875 ; v1(-36.195,13.97) v1(-36.195,15.155) ; v1(-36.195,13.97) v1(-35.56,15.113) ; v1(-36.195,13.97) v1(-36.195,15.155) ; v1(-36.195,13.97) v1(-35.56,15.748) ; v1(-36.195,13.97) v1(-36.195,15.155) ; v1(-36.195,13.97) v1(-35.56,15.113) ; v1(-36.195,13.97) v1(-36.195,15.155) ; v1(-36.195,13.97) v1(-35.56,15.748) ; v1(-36.195,13.97) v1(-36.195,15.155) ; v1(-36.195,13.97) v1(-35.56,15.113) ; v1(-36.195,13.97) v1(-36.195,15.155) ; v1(-36.195,13.97) v1(-35.56,15.113) ; v1(-36.195,13.97) v1(-36.195,15.155) ; v1(-36.195,13.97) -35.941,14.732 ; v1(-36.195,13.97) v1(-36.195,15.155) ; v1(-36.195,13.97) -34.798,15.875 ; v1(-36.195,13.97) v1(-36.195,15.155) ; v1(-36.195,13.97) v1(-35.56,15.113) ; v1(-36.195,13.97) v1(-36.195,15.155) ; v1(-36.195,13.97) v1(-35.56,15.748) ; v1(-36.195,13.97) v1(-36.195,15.155) ; v1(-36.195,13.97) v1(-35.56,15.113) ; v1(-36.195,13.97) v1(-36.195,15.155) ; v1(-36.195,13.97) v1(-35.56,15.748) ; v1(-36.195,13.97) v1(-36.195,15.155) ; v1(-36.195,13.97) v1(-35.56,15.113) ; v1(-36.195,13.97) v1(-36.195,15.155) ; v1(-36.195,13.97) v1(-35.56,15.113) ; v1(-36.195,13.97) v1(-36.195,15.155) ; v1(-36.195,13.97) -34.798,15.875 ; v1(-36.195,13.97) v1(-36.195,15.155) ; v1(-36.195,13.97) v1(-35.56,15.113) ; v1(-36.195,13.97) v1(-36.195,15.155) ; v1(-36.195,13.97) v1(-35.56,15.748) ; v1(-36.195,13.97) v1(-36.195,15.155) ; v1(-36.195,13.97) v1(-35.56,15.113) ; v1(-36.195,13.97) v1(-36.195,15.155) ; v1(-36.195,13.97) v1(-35.56,15.113) ; v1(-36.195,13.97) v1(-36.195,15.155) ; v1(-36.195,13.97) v1(-35.56,14.478) ; v1(-36.195,13.97) v1(-36.195,15.155) ; v1(-36.195,13.97) v1(-35.56,15.113) ; v1(-36.195,13.97) v1(-36.195,15.155) ; v1(-36.195,13.97) v1(-35.56,14.478) ; v1(-36.195,13.97) v1(-36.195,15.155) ; v1(-36.195,13.97) v1(-35.56,15.748) ; v1(-36.195,13.97) v1(-36.195,15.155) ; v1(-36.195,13.97) v1(-35.56,15.113) ; v1(-36.195,13.97) v1(-36.195,15.155) ; v1(-36.195,13.97) v1(-35.56,15.113) ; v1(-36.195,13.97) v1(-36.195,15.155) ; v1(-36.195,13.97) -35.941,14.732 ; v1(-36.195,13.97) v1(-36.195,15.155) ; v1(-36.195,13.97) -34.798,15.875 ; v1(-36.195,13.97) v1(-36.195,15.155) ; v1(-36.195,13.97) v1(-35.56,15.113) ; v1(-36.195,13.97) v1(-36.195,15.155) ; v1(-36.195,13.97) v1(-35.56,15.748) ; v1(-36.195,13.97) v1(-36.195,15.155) ; v1(-36.195,13.97) v1(-35.56,15.113) ; v1(-36.195,13.97) v1(-36.195,15.155) ; v1(-36.195,13.97) v1(-35.56,15.113) ; v1(-36.195,13.97) v1(-36.195,15.155) ; v1(-36.195,13.97) v1(-35.56,14.478) ; v1(-36.195,13.97) v1(-36.195,15.155) ; v1(-36.195,13.97) v1(-35.56,15.113) ; v1(-36.195,13.97) v1(-36.195,15.155) ; v1(-36.195,13.97) v1(-35.56,14.478) ; v1(-36.195,13.97) v1(-36.195,15.155) ; v1(-36.195,13.97) v1(-35.56,15.748) ; v1(-36.195,13.97) v1(-36.195,15.155) ; v1(-36.195,13.97) v1(-35.56,15.113) ; v1(-36.195,13.97) v1(-36.195,15.155) ; v1(-36.195,13.97) v1(-35.56,15.113) ; v1(-36.195,13.97) v1(-36.195,15.155) ; v1(-36.195,13.97) -34.798,15.875 ; v1(-36.195,13.97) v1(-36.195,15.155) ; v1(-36.195,13.97) v1(-35.56,15.113) ; v1(-36.195,13.97) v1(-36.195,15.155) ; v1(-36.195,13.97) v1(-35.56,15.748) ; v1(-36.195,13.97) v1(-36.195,15.155) ; v1(-36.195,13.97) v1(-35.56,15.113) ; v1(-36.195,13.97) v1(-36.195,15.155) ; v1(-36.195,13.97) -34.798,15.875 ; v1(-36.195,13.97) v1(-36.195,15.155) ; v1(-36.195,13.97) v1(-35.56,15.113) ; v1(-36.195,13.97) v1(-36.195,15.155) ; v1(-36.195,13.97) v1(-35.56,15.748) ; v1(-36.195,13.97) v1(-36.195,15.155) ; v1(-36.195,13.97) v1(-35.56,15.113) ; v1(-36.195,13.97) v1(-36.195,15.155) ; v1(-36.195,13.97) v1(-35.56,15.748) ; v1(-36.195,13.97) v1(-36.195,15.155) ; v1(-36.195,13.97) v1(-35.56,15.113) ; v1(-36.195,13.97) v1(-36.195,15.155) ; v1(-36.195,13.97) v1(-35.56,15.113) ; v1(-36.195,13.97) v1(-36.195,15.155) ; v1(-36.195,13.97) v1(-35.56,15.113) ; v1(-36.195,13.97) v1(-35.56,15.113) ; v1(-36.195,13.97) v1(-35.56,15.113) ; v1(-36.195,13.97) v1(-35.56,15.113) ; v1(-36.195,13.97) v1(-35.56,15.113) ; v1(-36.195,13.97) v1(-35.56,15.113) ; v1(-36.195,13.97) v1(-35.56,15.113) ; v1(-36.195,13.97) v1(-35.56,15.113) ; v1(-36.195,13.97) -34.798,19.558 ; v1(-36.195,13.97) -34.798,19.558 ; v1(-36.195,13.97) v1(-33.528,19.558) ; v1(-36.195,13.97) v1(-33.528,19.558) ; v1(-36.195,13.97) v1(-33.528,19.05) ; v1(-36.195,13.97) v1(-33.528,19.05) ; v1(-36.195,13.97) v1(-33.528,19.05) ; v1(-36.195,13.97) v1(-33.528,19.05) ; v1(-36.195,14.563) -34.798,15.875 ; v1(-36.195,14.563) v1(-35.56,14.478) ; v1(-36.195,14.563) v1(-35.56,15.748) ; v1(-36.195,14.563) v1(-35.56,15.748) ; v1(-36.195,14.563) v1(-35.56,15.113) ; v1(-36.195,14.563) v1(-35.56,15.113) ; v1(-36.195,14.563) v1(-35.56,15.113) ; v1(-36.195,14.563) v1(-35.56,15.113) ; v1(-36.195,14.563) v1(-36.195,15.155) ; v1(-36.195,14.563) v1(-36.195,15.155) ; v1(-36.195,14.563) v1(-36.195,15.155) ; v1(-36.195,14.563) v1(-36.195,15.155) ; v1(-36.195,14.563) v1(-36.195,15.155) ; v1(-36.195,14.563) v1(-36.195,15.155) ; v1(-36.195,14.563) v1(-36.195,15.155) ; v1(-36.195,14.563) v1(-36.195,15.155) ; v1(-36.195,15.155) -34.798,15.875 ; v1(-36.195,15.155) -35.941,14.732 ; v1(-36.195,15.155) -34.798,15.875 ; v1(-36.195,15.155) -34.798,15.875 ; v1(-36.195,15.155) v1(-35.56,14.478) ; v1(-36.195,15.155) v1(-35.56,14.478) ; v1(-36.195,15.155) -35.941,14.732 ; v1(-36.195,15.155) -34.798,15.875 ; v1(-36.195,15.155) v1(-35.56,14.478) ; v1(-36.195,15.155) v1(-35.56,14.478) ; v1(-36.195,15.155) -34.798,15.875 ; v1(-36.195,15.155) v1(-35.56,15.748) ; v1(-36.195,15.155) v1(-35.56,15.748) ; v1(-36.195,15.155) -35.941,14.732 ; v1(-36.195,15.155) -34.798,15.875 ; v1(-36.195,15.155) v1(-35.56,15.748) ; v1(-36.195,15.155) v1(-35.56,15.748) ; v1(-36.195,15.155) -34.798,15.875 ; v1(-36.195,15.155) v1(-35.56,15.748) ; v1(-36.195,15.155) v1(-35.56,15.748) ; v1(-36.195,15.155) v1(-35.56,14.478) ; v1(-36.195,15.155) v1(-35.56,15.748) ; v1(-36.195,15.155) v1(-35.56,14.478) ; v1(-36.195,15.155) v1(-35.56,15.748) ; v1(-36.195,15.155) -35.941,14.732 ; v1(-36.195,15.155) -34.798,15.875 ; v1(-36.195,15.155) v1(-35.56,15.748) ; v1(-36.195,15.155) v1(-35.56,15.748) ; v1(-36.195,15.155) v1(-35.56,14.478) ; v1(-36.195,15.155) v1(-35.56,15.748) ; v1(-36.195,15.155) v1(-35.56,14.478) ; v1(-36.195,15.155) v1(-35.56,15.748) ; v1(-36.195,15.155) -34.798,15.875 ; v1(-36.195,15.155) v1(-35.56,15.748) ; v1(-36.195,15.155) v1(-35.56,15.113) ; v1(-36.195,15.155) -35.941,14.732 ; v1(-36.195,15.155) -34.798,15.875 ; v1(-36.195,15.155) v1(-35.56,15.113) ; v1(-36.195,15.155) v1(-35.56,15.113) ; v1(-36.195,15.155) -34.798,15.875 ; v1(-36.195,15.155) v1(-35.56,15.113) ; v1(-36.195,15.155) v1(-35.56,15.113) ; v1(-36.195,15.155) v1(-35.56,14.478) ; v1(-36.195,15.155) v1(-35.56,15.113) ; v1(-36.195,15.155) v1(-35.56,14.478) ; v1(-36.195,15.155) v1(-35.56,15.113) ; v1(-36.195,15.155) -35.941,14.732 ; v1(-36.195,15.155) -34.798,15.875 ; v1(-36.195,15.155) v1(-35.56,15.113) ; v1(-36.195,15.155) v1(-35.56,15.113) ; v1(-36.195,15.155) v1(-35.56,14.478) ; v1(-36.195,15.155) v1(-35.56,15.113) ; v1(-36.195,15.155) v1(-35.56,14.478) ; v1(-36.195,15.155) v1(-35.56,15.113) ; v1(-36.195,15.155) -34.798,15.875 ; v1(-36.195,15.155) v1(-35.56,15.113) ; v1(-36.195,15.155) v1(-35.56,15.748) ; v1(-36.195,15.155) v1(-35.56,15.113) ; v1(-36.195,15.155) v1(-35.56,15.748) ; v1(-36.195,15.155) v1(-35.56,15.113) ; v1(-36.195,15.155) v1(-35.56,15.113) ; v1(-36.195,15.155) -35.941,14.732 ; v1(-36.195,15.155) -34.798,15.875 ; v1(-36.195,15.155) v1(-35.56,15.113) ; v1(-36.195,15.155) v1(-35.56,15.748) ; v1(-36.195,15.155) v1(-35.56,15.113) ; v1(-36.195,15.155) v1(-35.56,15.748) ; v1(-36.195,15.155) v1(-35.56,15.113) ; v1(-36.195,15.155) v1(-35.56,15.113) ; v1(-36.195,15.155) -34.798,15.875 ; v1(-36.195,15.155) v1(-35.56,15.113) ; v1(-36.195,15.155) v1(-35.56,15.748) ; v1(-36.195,15.155) v1(-35.56,15.113) ; v1(-36.195,15.155) v1(-35.56,15.113) ; v1(-36.195,15.155) v1(-35.56,14.478) ; v1(-36.195,15.155) v1(-35.56,15.113) ; v1(-36.195,15.155) v1(-35.56,14.478) ; v1(-36.195,15.155) v1(-35.56,15.748) ; v1(-36.195,15.155) v1(-35.56,15.113) ; v1(-36.195,15.155) v1(-35.56,15.113) ; v1(-36.195,15.155) -35.941,14.732 ; v1(-36.195,15.155) -34.798,15.875 ; v1(-36.195,15.155) v1(-35.56,15.113) ; v1(-36.195,15.155) v1(-35.56,15.748) ; v1(-36.195,15.155) v1(-35.56,15.113) ; v1(-36.195,15.155) v1(-35.56,15.113) ; v1(-36.195,15.155) v1(-35.56,14.478) ; v1(-36.195,15.155) v1(-35.56,15.113) ; v1(-36.195,15.155) v1(-35.56,14.478) ; v1(-36.195,15.155) v1(-35.56,15.748) ; v1(-36.195,15.155) v1(-35.56,15.113) ; v1(-36.195,15.155) v1(-35.56,15.113) ; v1(-36.195,15.155) -34.798,15.875 ; v1(-36.195,15.155) v1(-35.56,15.113) ; v1(-36.195,15.155) v1(-35.56,15.748) ; v1(-36.195,15.155) v1(-35.56,15.113) ; v1(-36.195,15.155) -34.798,15.875 ; v1(-36.195,15.155) v1(-35.56,15.113) ; v1(-36.195,15.155) v1(-35.56,15.748) ; v1(-36.195,15.155) v1(-35.56,15.113) ; v1(-36.195,15.155) v1(-35.56,15.748) ; v1(-36.195,15.155) v1(-35.56,15.113) ; v1(-36.195,15.155) v1(-35.56,15.113) ; -35.941,14.732 v1(-35.56,14.478) ; -35.941,14.732 v1(-35.56,15.748) ; -35.941,14.732 v1(-35.56,15.748) ; -35.941,14.732 v1(-35.56,15.113) ; -35.941,14.732 v1(-35.56,15.113) ; -35.941,14.732 v1(-35.56,15.113) ; -35.941,14.732 v1(-35.56,15.113) ; -35.941,14.732 -34.798,15.875 ; v1(-35.56,14.478) -34.798,15.875 ; v1(-35.56,14.478) -34.798,15.875 ; v1(-35.56,14.478) v1(-35.56,15.748) ; v1(-35.56,14.478) v1(-35.56,15.748) ; v1(-35.56,14.478) v1(-35.56,15.748) ; v1(-35.56,14.478) v1(-35.56,15.748) ; v1(-35.56,14.478) v1(-35.56,15.113) ; v1(-35.56,14.478) v1(-35.56,15.113) ; v1(-35.56,14.478) v1(-35.56,15.113) ; v1(-35.56,14.478) v1(-35.56,15.113) ; v1(-35.56,14.478) v1(-35.56,15.113) ; v1(-35.56,14.478) v1(-35.56,15.113) ; v1(-35.56,14.478) v1(-35.56,15.113) ; v1(-35.56,14.478) v1(-35.56,15.113) ; v1(-35.56,15.113) -34.798,15.875 ; v1(-35.56,15.113) -34.798,15.875 ; v1(-35.56,15.113) -34.798,15.875 ; v1(-35.56,15.113) -34.798,15.875 ; v1(-35.56,15.113) v1(-35.56,15.748) ; v1(-35.56,15.113) v1(-35.56,15.748) ; v1(-35.56,15.113) -34.798,15.875 ; v1(-35.56,15.113) v1(-35.56,15.748) ; v1(-35.56,15.113) v1(-35.56,15.748) ; v1(-35.56,15.113) -34.798,15.875 ; v1(-35.56,15.113) v1(-35.56,15.748) ; v1(-35.56,15.113) v1(-35.56,15.748) ; v1(-35.56,15.113) -34.798,15.875 ; v1(-35.56,15.113) v1(-35.56,15.748) ; v1(-35.56,15.113) v1(-35.56,15.748) ; v1(-35.56,15.113) -34.798,15.875 ; v1(-35.56,15.113) v1(-35.56,15.748) ; v1(-35.56,15.113) -34.798,15.875 ; v1(-35.56,15.113) v1(-35.56,15.748) ; v1(-35.56,15.113) -34.798,19.558 ; v1(-35.56,15.113) -34.798,19.558 ; v1(-35.56,15.113) v1(-33.528,19.558) ; v1(-35.56,15.113) v1(-33.528,19.558) ; v1(-35.56,15.113) v1(-33.528,19.05) ; v1(-35.56,15.113) v1(-33.528,19.05) ; v1(-35.56,15.113) v1(-33.528,19.05) ; v1(-35.56,15.113) v1(-33.528,19.05) ; v1(-35.56,15.748) -34.798,15.875 ; v1(-35.56,15.748) -34.798,15.875 ; v1(-35.56,15.748) -34.798,15.875 ; v1(-35.56,15.748) -34.798,15.875 ; v1(-35.56,15.748) -34.798,15.875 ; v1(-35.56,15.748) -34.798,19.558 ; v1(-35.56,15.748) v1(-33.528,19.558) ; v1(-35.56,15.748) v1(-33.528,19.05) ; v1(-35.56,15.748) v1(-33.528,19.05) ; -34.798,15.875 v1(-33.528,19.558) ; -34.798,15.875 v1(-33.528,19.05) ; -34.798,15.875 v1(-33.528,19.05) ; -34.798,15.875 -34.798,19.558 ; -34.798,19.558 v1(-33.528,19.558) ; -34.798,19.558 v1(-33.528,19.558) ; -34.798,19.558 v1(-33.528,19.558) ; -34.798,19.558 v1(-33.528,19.558) ; -34.798,19.558 v1(-33.528,19.558) ; -34.798,19.558 v1(-33.528,19.05) ; -34.798,19.558 v1(-33.528,19.05) ; -34.798,19.558 v1(-33.528,19.05) ; -34.798,19.558 v1(-33.528,19.05) ; -34.798,19.558 v1(-33.528,19.05) ; -34.798,19.558 v1(-33.528,19.05) ; -34.798,19.558 v1(-33.528,19.05) ; -34.798,19.558 v1(-33.528,19.05) ; -34.798,19.558 v1(-33.528,19.05) ; -34.798,19.558 v1(-33.528,19.05) ; -34.798,19.558 -34.798,19.876 ; -34.798,19.876 v1(-33.528,19.558) ; -34.798,19.876 v1(-33.528,19.558) ; -34.798,19.876 v1(-33.528,19.558) ; -34.798,19.876 v1(-33.528,19.05) ; -34.798,19.876 v1(-33.528,19.05) ; -34.798,19.876 v1(-33.528,19.05) ; -34.798,19.876 v1(-33.528,19.05) ; -34.798,19.876 v1(-33.528,19.05) ; -34.798,19.876 v1(-33.528,19.05) ; v1(-33.528,19.05) v1(-33.528,19.558) ; v1(-33.528,19.05) v1(-33.528,19.558) ; v1(-33.528,19.05) v1(-33.528,19.558) ; v1(-33.528,19.05) v1(-33.528,19.558) ; v1(-33.528,19.05) v1(-33.528,19.558) ; v1(-33.528,19.05) v1(-33.528,19.558) ; v1(-33.528,19.05) v1(-33.528,19.558) ; v1(-33.528,19.05) v1(-33.528,19.558) ; v1(-33.528,19.05) v1(-33.528,19.558) ; v1(-33.528,19.05) v1(-33.528,19.558) ; v1(-33.528,19.05) v1(-33.528,19.558) ; v1(-33.528,19.05) v1(-33.528,19.558) ; v1(-33.528,19.05) v1(-33.528,19.558)
  Bottom Layer w0.152: C62.1@-24.958,16.64 -24.511,17.018 ; C62.1@-24.944,16.661 -24.511,16.954 ; C62.1@-24.921,16.691 -24.494,16.9 ; C62.1@-24.841,16.535 -24.511,17.018 ; C62.1@-24.837,16.544 -24.511,16.954 ; C62.1@-24.828,16.561 -24.494,16.9 ; C62.1@-24.687,16.817 ccw(c-24.714,17.018) -24.511,17.018 ; C62.1@-24.643,16.82 ccw(c-24.645,16.954) -24.511,16.954 ; C62.1@-24.417,16.43 -24.494,16.9 ; C62.1@-24.417,16.439 -24.511,16.954 ; C62.1@-24.417,16.44 -24.511,17.018 ; C62.1@-24.407,16.74 cw(c-24.239,16.954) -24.511,16.954 ; C62.1@-24.382,16.719 cw(c-24.1,17.018) -24.511,17.018 ; C62.1@-24.267,16.491 -24.511,16.954 ; C62.1@-24.266,16.482 -24.494,16.9 ; C62.1@-24.266,16.486 -24.511,17.018 ; C62.1@-24.638,16.447 -24.511,17.018 ; C62.1@-24.638,16.447 -24.511,16.954 ; C62.1@-24.638,16.447 -24.494,16.9 ; -24.511,16.954 -24.511,17.018
  Bottom Layer w0.254: -33.528,17.78 -33.528,16.51 -33.274,16.256 -32.131,16.256 -32.004,16.383 ; Q4.6@-32.654,16.957 -32.654,16.271 Q4.6@-32.654,16.984 ; Q4.1@-32.654,18.83 -32.654,19.37 ; Q4.1@-32.654,18.857 -32.654,19.37 ; -32.015,19.06 ccw(c-31.801,19.06) Q4.2@-31.952,18.909 ; Q4.5@-32.004,16.957 -32.004,16.383 ; Q4.5@-32.004,16.984 -32.004,16.383 ; Q4.2@-32.004,18.83 -32.015,18.841 -32.015,19.431 ; Q4.2@-32.004,18.857 -32.015,19.431 ; Q9.1@-26.069,19.289 -26.069,18.83 -25.98,18.741 -24.837,18.741 -23.622,18.741 -23.495,18.868 -23.495,19.289 ; -25.753,19.939 cw(c-25.753,19.487) Q9.7@-25.312,19.583 ; Q9.7@-25.56,19.529 ccw(c-26.068,19.418) Q9.2@-26.069,19.939 ; Q9.7@-25.42,19.303 -25.808,19.869 ; Q9.7@-25.238,19.487 -25.808,19.869 ; Q9.7@-25.232,19.483 Q9.2@-26.041,19.939 ; Q9.7@-25.23,19.483 Q9.2@-26.069,19.939 ; Q9.7@-25.136,20.011 -25.808,19.869 ; Q9.7@-25.116,20.008 Q9.2@-26.069,19.939 ; Q9.6@-24.223,19.289 -23.495,19.289 ; Q9.5@-24.223,19.939 -23.495,19.939 ; Q9.6@-24.196,19.289 -23.495,19.289 ; Q9.5@-24.196,19.939 -23.495,19.939 ; -32.654,19.37 -32.304,19.72 -32.015,19.431 ; Q9.2@-26.069,19.939 -25.132,19.753 -25.808,19.869 ; Q9.2@-26.069,19.939 Q9.7@-25.171,19.614 ; Q9.2@-26.069,19.939 -25.471,19.939 Q9.2@-26.041,19.939 ; Q9.2@-26.041,19.939 -25.808,19.869 ; Q9.2@-26.041,19.939 -25.115,20.008 Q9.2@-26.041,19.939 ; Q9.2@-26.041,19.939 -25.131,19.752 Q9.2@-26.041,19.939 ; Q9.2@-26.041,19.939 Q9.7@-25.171,19.614 ; Q9.2@-26.041,19.939 Q9.7@-25.171,19.614 ; -25.808,19.869 Q9.7@-25.171,19.614 ; -23.495,19.289 -23.495,19.939
  Bottom Layer w0.762: -33.401,17.907 Q4.7@-32.329,17.907 ; -32.304,19.72 C56.2@-32.304,20.46 R56.2@-32.304,21.476 ; Q9.7@-24.983,19.572 ccw(c-24.114,19.304) -24.757,18.661 ; -24.972,18.876 cw(c-25.688,18.161) C63.1@-24.676,18.161 ; v1@-24.947,17.327 ccw(c-25.406,17.786) -24.757,17.786 ; v1@-24.947,17.471 cw(c-25.406,17.012) -24.757,17.012 ; -24.812,18.667 C63.1@-24.807,18.161 ; -24.757,16.9 ccw(c-24.184,16.9) C62.1@-24.589,16.495 ; C63.1@-24.682,18.123 ccw(c-25.276,18.302) -24.837,18.741 ; C62.1@-24.638,16.447 C63.1@-24.757,18.161 ; -33.528,17.78 v1(-33.528,19.558) ; -33.528,17.78 v1(-33.528,19.05) ; -33.528,17.78 v1(-33.528,19.05) ; -33.528,17.78 v1(-33.528,19.05) ; v1(-33.528,19.05) v1(-33.528,19.558) ; v1(-33.528,19.05) v1(-33.528,19.558) ; v1(-33.528,19.05) v1(-33.528,19.558) ; -25.146,19.05 C63.1@-24.807,18.161 ; -25.146,19.05 Q9.7@-25.146,19.614 ; -25.146,19.05 Q9.7@-25.146,19.614 ; -25.146,19.05 -24.837,18.741 ; -25.146,19.05 Q9.7@-25.146,19.614 ; Q9.7@-25.121,19.614 -24.837,18.741 ; Q9.7@-25.121,19.614 -24.837,18.741 ; Q9.7@-25.121,19.614 -24.837,18.741 ; Q9.7@-25.121,19.614 -24.837,18.741 ; Q9.7@-25.121,19.614 C63.1@-24.807,18.161 ; Q9.7@-25.121,19.614 C63.1@-24.807,18.161 ; Q9.7@-25.121,19.614 C63.1@-24.807,18.161 ; -24.837,18.741 cw(c-24.319,19.259) -24.989,19.556 ccw(c-24.319,19.259) -24.837,18.741 ; -24.837,18.741 C63.1@-24.807,18.161 ; -24.837,18.741 C63.1@-24.807,18.161 ; -24.837,18.741 -24.757,18.661 ; C63.1@-24.757,18.161 -24.757,16.565 C63.1@-24.757,18.161 ; C63.1@-24.757,18.161 -24.757,18.661 ; C63.1@-24.757,18.161 -24.757,18.661 ; C63.1@-24.707,18.161 -24.672,18.445 C63.1@-24.707,18.161
  Bottom Layer w1.27: C61.1@-34.802,21.403 cw(c-34.343,20.945) C61.1@-34.343,21.593 ; -32.641,21.593 -35.811,21.593 v1(-36.703,20.701) ; v1(-36.703,20.701) -36.703,20.066 v1(-36.703,20.701)
  other v1: -36.195,15.748 -25.019,17.399 -24.511,17.399 -48.768,18.161
D+: R66.1 U3.2 | length 4.6
  Bottom Layer w0.152: U3.2@-21.114,4.859 -19.898,4.859 R66.1@-19.177,5.58 ; U3.2@-20.766,4.859 -20.184,4.859 ; -19.559,5.198 cw(c-19.177,4.816) R66.1@-19.177,5.356 ; -19.438,5.319 ccw(c-19.65,5.53) R66.1@-19.351,5.53 ; R66.1@-19.321,5.627 -19.447,5.284 ; R66.1@-19.177,5.53 -19.447,5.284 ; R66.1@-19.094,5.377 -19.447,5.284